# Altium PCB 中板2020-03-20.PCBDOC
Units mm, origin at the board's own origin, x right, y up, seen from the top; angles counter-clockwise.
Board outline 266 x 58 mm, 2 copper layers (Top Layer, Bottom Layer); 7 components, 81 nets, 242 pads, 0 vias.
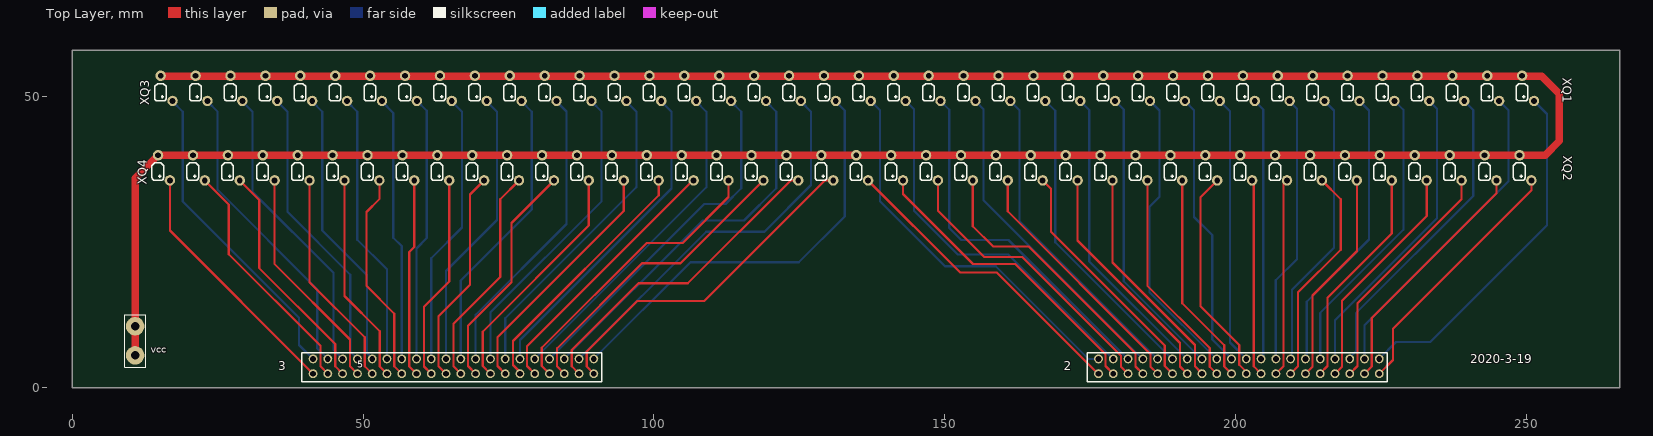
[diagram p0: Top Layer view]
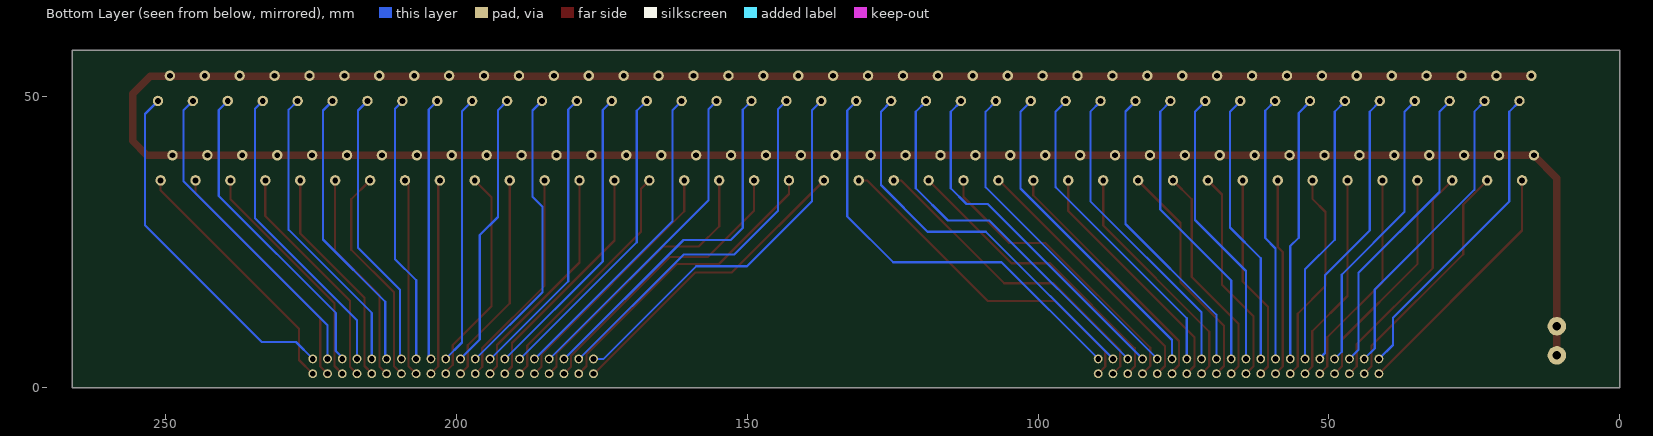
[diagram p1: Bottom Layer view, seen from below]

## Layer stack, top to bottom
Top Solder: solder mask 0.0102, Solder Resist, Dk 3.5
Top Layer: signal copper 0.0356
Dielectric1: dielectric 0.32, FR-4, Dk 4.8
Bottom Layer: signal copper 0.0356
Bottom Solder: solder mask 0.0102, Solder Resist, Dk 3.5

## Board outline
0,0 266,0 266,58 0,58

## Design rules (kind name [scope] priority, off if disabled: settings)
Clearance [All] p1: gap=0.254 ignorepadtopadclearanceinfootprint=FALSE
DiffPairsRouting [All] p1: maxlimit=0.254 minlimit=0.254 mostfreqgap=0.254 toplayer_minwidth=0.381 toplayer_maxwidth=4 toplayer_prefwidth=0.381 bottomlayer_minwidth=0.381 bottomlayer_maxwidth=4 bottomlayer_prefwidth=0.381 maxuncoupledlength=12.7
FabricationTestPointUsage TestPointUsage [All] p1: valid=0 allowmultiple=FALSE
FabricationTestpoint Testpoint [All] p1: side=3 testpointundercomponent=TRUE minsize=1.016 maxsize=2.54 preferedsize=1.524 minholesize=0 maxholesize=1.016 preferedholesize=0.813 testpointgrid=0.025 allowsidetop=TRUE allowsidebottom=TRUE usegrid=TRUE gridtolerance=0
PolygonConnect [All] p1: connectstyle=Relief reliefconductorwidth=0.254 reliefentries=4 polygonreliefangle="90 Angle" airgapwidth=0.254
RoutingVias [All] p1: holewidth=0.8 width=1.6 viastyle="Through Hole" minholewidth=0.711 minwidth=1.27 maxholewidth=0.711 maxwidth=1.27
SilkToSolderMaskClearance SilkscreenOverComponentPads [IsPad] p1: minsilkscreentomaskgap=0.254 clearancetoexposedcopper=TRUE
SolderMaskExpansion [All] p1: expansion=0.102
Width [All] p1: maxlimit=1.27 minlimit=0.254 preferedwidth=0.381 minimp=50.000000 maximp=50.000000 favimp=50.000000
26 further rules are at their usual default settings.

## Classes and differential pairs
component class 盲文原理图1: 2 XQ1 XQ2

## Components (designator, comment, footprint, x,y, rotation, side; value= is the part's Value field where it differs from the comment)
2 "Header 21X2" XINPIAN 174.5,1 r180 top (schematic designator 1)
3 "Header 21X2" XINPIAN 39.5,1 r180 top (schematic designator 1)
XQ1 "Header 20X2" XIANQUAN1 251.25,49.27 r180 top
XQ2 "Header 20X2" XIANQUAN1 250.799,35.61 r180 top
XQ3 "Header 20X2" XIANQUAN1 131.25,49.27 r180 top (schematic designator XQ1)
XQ4 "Header 20X2" XIANQUAN1 130.799,35.61 r180 top (schematic designator XQ2)
? "" N1A 9,3.5 r0 top

## Footprints (in the part's own frame and the unit in brackets; to place one, negate y for a bottom-side part, rotate by r counter-clockwise, add the part's x,y. Pads: shape width x height; smd on the part's side, far side on the other; paste and mask are expansions set on the pad)
N1A [mm]
  round 3.175 hole 1.5: 1(1.825,2.05) 2(1.825,7.05)
  silkscreen extent 0,0 3.65,9
XIANQUAN1 [mm]
  round 1.8 hole 1: 1(2.04,-4.34) 2(0,0) 3(8.04,-4.34) 4(6,0) 5(14.04,-4.34) 6(12,0) 7(20.04,-4.34) 8(18,0) 9(26.04,-4.34) 10(24,0) 11(32.04,-4.34) 12(30,0) 13(38.04,-4.34) 14(36,0) 15(44.04,-4.34) 16(42,0) 17(50.04,-4.34) 18(48,0) 19(56.04,-4.34) 20(54,0) 21(62.04,-4.34) 22(60,0) 23(68.04,-4.34) 24(66,0) 25(74.04,-4.34) 26(72,0) 27(80.04,-4.34) 28(78,0) 29(86.04,-4.34) 30(84,0) 31(92.04,-4.34) 32(90,0) 33(98.04,-4.34) 34(96,0) 35(104.04,-4.34) 36(102,0) 37(110.04,-4.34) 38(108,0) 39(116.04,-4.34) 40(114,0)
  silkscreen extent 1.08,-3 117.08,0
XINPIAN [mm]
  round 1.524 hole 1: 1(-1.9,-3.94) 2(-4.44,-3.94) 3(-6.98,-3.94) 4(-9.52,-3.94) 5(-12.06,-3.94) 6(-14.6,-3.94) 7(-17.14,-3.94) 8(-19.68,-3.94) 9(-22.22,-3.94) 10(-24.76,-3.94) 11(-27.3,-3.94) 12(-29.84,-3.94) 13(-32.38,-3.94) 14(-34.92,-3.94) 15(-37.46,-3.94) 16(-40,-3.94) 17(-42.54,-3.94) 18(-45.08,-3.94) 19(-47.62,-3.94) 20(-50.16,-3.94) 21(-50.16,-1.4) 22(-47.62,-1.4) 23(-45.08,-1.4) 24(-42.54,-1.4) 25(-40,-1.4) 26(-37.46,-1.4) 27(-34.92,-1.4) 28(-32.38,-1.4) 29(-29.84,-1.4) 30(-27.3,-1.4) 31(-24.76,-1.4) 32(-22.22,-1.4) 33(-19.68,-1.4) 34(-17.14,-1.4) 35(-14.6,-1.4) 36(-12.06,-1.4) 37(-9.52,-1.4) 38(-6.98,-1.4) 39(-4.44,-1.4) 40(-1.9,-1.4)
  silkscreen extent -51.5,-5 0,0

## Part data
2 3: library part "Header 22X2", "Header, 22-Pin, Dual row"
XQ1 XQ2 XQ3 XQ4: "Header, 20-Pin, Dual row"

## Nets (pads, with @x,y where several pads share a name; then routed paths per layer and width w, separated by ;. In a path a pad name is that pad's centre, name@x,y a point inside that pad or via, vN(x,y) a via of type N, cw(c..) or ccw(c..) an arc to the next point about the centre after c; other vN are vias at no path point)
GND: ?.1 ?.2 XQ1.1 XQ1.3 XQ1.5 XQ1.7 XQ1.9 XQ1.11 XQ1.13 XQ1.15 XQ1.17 XQ1.19 XQ1.21 XQ1.23 XQ1.25 XQ1.27 XQ1.29 XQ1.31 XQ1.33 XQ1.35 XQ1.37 XQ1.39 XQ2.1 XQ2.3 XQ2.5 XQ2.7 XQ2.9 XQ2.11 XQ2.13 XQ2.15 XQ2.17 XQ2.19 XQ2.21 XQ2.23 XQ2.25 XQ2.27 XQ2.29 XQ2.31 XQ2.33 XQ2.35 XQ2.37 XQ2.39 XQ3.1 XQ3.3 XQ3.5 XQ3.7 XQ3.9 XQ3.11 XQ3.13 XQ3.15 XQ3.17 XQ3.19 XQ3.21 XQ3.23 XQ3.25 XQ3.27 XQ3.29 XQ3.31 XQ3.33 XQ3.35 XQ3.37 XQ3.39 XQ4.1 XQ4.3 XQ4.5 XQ4.7 XQ4.9 XQ4.11 XQ4.13 XQ4.15 XQ4.17 XQ4.19 XQ4.21 XQ4.23 XQ4.25 XQ4.27 XQ4.29 XQ4.31 XQ4.33 XQ4.35 XQ4.37 XQ4.39 | length 527.6
  Top Layer w1.27: ?.1 ?.2 10.825,36.016 XQ4.39 XQ4.37 XQ4.35 XQ4.33 XQ4.31 XQ4.29 XQ4.27 XQ4.25 XQ4.23 XQ4.21 XQ4.19 XQ4.17 XQ4.15 XQ4.13 XQ4.11 XQ4.9 XQ4.7 XQ4.5 XQ4.3 XQ4.1 XQ2.39 XQ2.37 XQ2.35 XQ2.33 XQ2.31 XQ2.29 XQ2.27 XQ2.25 XQ2.23 XQ2.21 XQ2.19 XQ2.17 XQ2.15 XQ2.13 XQ2.11 XQ2.9 XQ2.7 XQ2.5 XQ2.3 XQ2.1 253.15,39.95 255.588,42.388 255.588,50.487 252.575,53.5 XQ3.39@15.21,53.5
XQ1_1: 3.20 XQ3.2 | length 73.6
  Bottom Layer w0.381: 3.20 106.27,21.55 124.9,21.55 132.775,29.425 132.775,47.635 XQ3.2@131.25,49.16
XQ1_2: 3.19 XQ3.4 | length 67.3
  Bottom Layer w0.381: 3.19 108.98,26.8 118.98,26.8 127,34.82 127,47.41 XQ3.4@125.25,49.16
XQ1_3: 3.18 XQ3.6 | length 64.2
  Bottom Layer w0.381: 3.18 108.365,28.725 115.475,28.725 121,34.25 121,47.41 XQ3.6@119.25,49.16
XQ1_4: 3.17 XQ3.8 | length 60.7
  Bottom Layer w0.381: 3.17 108.65,31.55 112.275,31.55 115,34.275 115,47.41 XQ3.8@113.25,49.16
XQ1_5: 3.16 XQ3.10 | length 57.2
  Bottom Layer w0.381: 3.16 109,34.44 109,47.41 XQ3.10@107.25,49.16
XQ1_6: 3.15 XQ3.12 | length 55.7
  Bottom Layer w0.381: 3.15 76.96,8.185 103,34.225 103,47.41 XQ3.12@101.25,49.16
XQ1_7: 3.14 XQ3.14 | length 54.3
  Bottom Layer w0.381: 3.14 74.42,11.92 96.95,34.45 97,34.45 97,47.41 XQ3.14@95.25,49.16
XQ1_8: 3.13 XQ3.16 | length 52.9
  Bottom Layer w0.381: 3.13 71.88,12.93 91,32.05 91,47.41 XQ3.16@89.25,49.16
XQ1_9: 3.12 XQ3.18 | length 51.4
  Bottom Layer w0.381: 3.12 69.34,12.515 84.95,28.125 84.95,47.46 XQ3.18@83.25,49.16
XQ1_10: 3.11 XQ3.20 | length 50
  Bottom Layer w0.381: 3.11 66.8,18.425 78.975,30.6 78.975,47.435 XQ3.20@77.25,49.16
XQ1_11: 3.10 XQ3.22 | length 48.6
  Bottom Layer w0.381: 3.10 64.26,20.06 73,28.8 73,47.41 XQ3.22@71.25,49.16
XQ1_12: 3.9 XQ3.24 | length 47.1
  Bottom Layer w0.381: 3.9 61.72,22.245 67,27.525 67,47.41 XQ3.24@65.25,49.16
XQ1_13: 3.8 XQ3.26 | length 45.8
  Bottom Layer w0.381: 3.8 59.18,23.93 60.95,25.7 60.95,47.57 XQ3.26
XQ1_14: 3.7 XQ3.28 | length 45.6
  Bottom Layer w0.381: XQ3.28@53.25,49.16 55.2,47.21 55.2,25.775 56.64,24.335 3.7
XQ1_15: 3.6 XQ3.30 | length 47.1
  Bottom Layer w0.381: XQ3.30@47.25,49.16 49,47.41 49,25.425 54.1,20.325 3.6
XQ1_16: 3.5 XQ3.32 | length 48.5
  Bottom Layer w0.381: XQ3.32@41.25,49.16 43,47.41 43,27 50.688,19.312 50.688,5.953 51.56,5.081 3.5
XQ1_17: 3.4 XQ3.34 | length 49.9
  Bottom Layer w0.381: XQ3.34@35.25,49.16 37,47.41 37,30.209 47.804,19.404 47.804,6.156 3.4
XQ1_18: 3.3 XQ3.36 | length 51.4
  Bottom Layer w0.381: XQ3.36@29.25,49.16 31,47.41 31,33.62 44.935,19.685 44.935,6.485 3.3
XQ1_19: 3.2 XQ3.38 | length 52.8
  Bottom Layer w0.381: XQ3.38@23.25,49.16 25,47.41 25,34 42.138,16.862 42.138,6.743 3.2
XQ1_20: 3.1 XQ3.40 | length 54.2
  Bottom Layer w0.381: XQ3.40@17.25,49.16 19,47.41 19,32 39,12 39,7.34 3.1
XQ2_1: 3.21 XQ4.2 | length 58.9
  Top Layer w0.381: 3.21 88.425,3.635 88.425,6.225 97.1,14.9 108.625,14.9 129.335,35.61 XQ4.2
XQ2_2: 3.22 XQ4.4 | length 55.6
  Top Layer w0.381: 3.22 85.85,3.67 85.85,6.475 97.325,17.95 105.825,17.95 123.485,35.61 XQ4.4
XQ2_3: 3.23 XQ4.6 | length 52.3
  Top Layer w0.381: 3.23 83.35,3.63 83.35,6.775 97.95,21.375 104.564,21.375 XQ4.6
XQ2_4: 3.24 XQ4.8 | length 50.7
  Top Layer w0.381: 3.24 80.725,3.715 80.725,6.85 98.75,24.875 104.917,24.875 112.799,32.757 XQ4.8
XQ2_5: 3.25 XQ4.10 | length 45.7
  Top Layer w0.381: 3.25 78.175,3.725 78.175,7.125 106.66,35.61 XQ4.10
XQ2_6: 3.26 XQ4.12 | length 44.1
  Top Layer w0.381: 3.26 76.96,2.677 75.75,3.887 75.75,8 100.799,33.049 XQ4.12
XQ2_7: 3.27 XQ4.14 | length 42.7
  Top Layer w0.381: 3.27 73.1,3.72 73.1,8.675 94.799,30.374 XQ4.14
XQ2_8: 3.28 XQ4.16 | length 41.3
  Top Layer w0.381: 3.28 70.55,3.73 70.55,9.625 88.799,27.874 XQ4.16
XQ2_9: 3.29 XQ4.18 | length 39.9
  Top Layer w0.381: 3.29 68.025,3.715 68.025,10.625 75.5,18.1 75.5,28.311 XQ4.18
XQ2_10: 3.30 XQ4.20 | length 38.8
  Top Layer w0.381: 3.30 65.525,3.675 65.525,10.975 73.575,19.025 73.575,32.386 XQ4.20 XQ4.20@77.1,35.309
XQ2_11: 3.31 XQ4.22 | length 37
  Top Layer w0.381: 3.31 62.975,3.685 62.975,12.275 68.375,17.675 68.375,33.186 XQ4.22
XQ2_12: 3.32 XQ4.24 | length 35.5
  Top Layer w0.381: 3.32 60.475,3.645 60.475,13.9 64.799,18.224 XQ4.24
XQ2_13: 3.33 XQ4.26 | length 34.1
  Top Layer w0.381: XQ4.26 58.799,24.173 57.95,23.324 57.95,3.63 3.33
XQ2_14: 3.34 XQ4.28 | length 36.6
  Top Layer w0.381: XQ4.28 52.799,32.399 50.575,30.175 50.575,17.488 55.35,12.712 55.35,3.69 3.34
XQ2_15: 3.35 XQ4.30 | length 36.2
  Top Layer w0.381: XQ4.30 46.799,15.751 52.85,9.7 52.85,3.65 3.35
XQ2_16: 3.36 XQ4.32 | length 37.7
  Top Layer w0.381: XQ4.32 40.799,18.126 50.275,8.65 50.275,3.685 3.36
XQ2_17: 3.37 XQ4.34 | length 39.1
  Top Layer w0.381: XQ4.34 34.799,21.226 47.75,8.275 47.75,3.67 3.37
XQ2_18: 3.38 XQ4.36 | length 40.5
  Top Layer w0.381: XQ4.36 32.159,32.25 32.159,20.541 45.2,7.5 45.2,3.68 3.38
XQ2_19: 3.39 XQ4.38 | length 42
  Top Layer w0.381: XQ4.38 26.93,31.48 26.93,22.92 42.7,7.15 42.7,3.64 3.39
XQ2_20: 3.40 XQ4.40 | length 43.4
  Top Layer w0.381: XQ4.40 16.799,27.001 3.40
XQ3_1: 2.21 XQ2.2 | length 44
  Top Layer w0.381: 2.21 227.025,4.765 227.025,10.125 250.799,33.899 XQ2.2
XQ3_2: 2.22 XQ2.4 | length 42.7
  Top Layer w0.381: 2.22 223.35,3.63 223.35,11.963 244.799,33.413 XQ2.4 XQ2.4@244.7,35.511
XQ3_3: 2.23 XQ2.6 | length 41.2
  Top Layer w0.381: 2.23 220.9,3.72 220.9,14.5 238.799,32.399 XQ2.6
XQ3_4: 2.24 XQ2.8 | length 39.7
  Top Layer w0.381: 2.24 218.247,3.607 218.247,14.946 232.799,29.499 XQ2.8
XQ3_5: 2.25 XQ2.10 | length 39
  Top Layer w0.381: 2.25 214.5,2.486 215.75,3.736 215.75,15.425 226.799,26.474 XQ2.10 XQ2.10@226.325,35.136
XQ3_6: 2.26 XQ2.12 | length 36.9
  Top Layer w0.381: 2.26 213.167,3.607 213.167,15.816 220.825,23.475 220.825,35.584 XQ2.12
XQ3_7: 2.27 XQ2.14 | length 38.1
  Top Layer w0.381: 2.27 210.7,3.68 210.7,16.375 218.025,23.7 218.025,32.384 XQ2.14
XQ3_8: 2.28 XQ2.16 | length 34
  Top Layer w0.381: 2.28 208.214,3.734 208.214,35.024 XQ2.16
XQ3_9: 2.29 XQ2.18 | length 33.8
  Top Layer w0.381: XQ2.18 203.075,35.334 203.075,3.665 2.29
XQ3_10: 2.30 XQ2.20 | length 37.6
  Top Layer w0.381: XQ2.20 193.95,32.761 193.95,13.95 200.575,7.325 200.575,3.934 201.8,2.709 2.30
XQ3_11: 2.31 XQ2.22 | length 36.7
  Top Layer w0.381: XQ2.22 190.799,14.501 198.025,7.275 198.025,3.635 2.31
XQ3_12: 2.32 XQ2.24 | length 38.1
  Top Layer w0.381: XQ2.24 184.799,17.526 195.514,6.812 195.514,3.607 2.32
XQ3_13: 2.33 XQ2.26 | length 39.6
  Top Layer w0.381: XQ2.26 178.799,21.501 192.974,7.327 192.974,3.652 194.18,2.445 2.33
XQ3_14: 2.34 XQ2.28 | length 41
  Top Layer w0.381: XQ2.28 172.799,25.276 190.4,7.675 190.4,3.64 2.34
XQ3_15: 2.35 XQ2.30 | length 42.4
  Top Layer w0.381: XQ2.30 168.25,34.159 168.25,26.775 187.8,7.225 187.8,3.7 2.35
XQ3_16: 2.36 XQ2.32 | length 43.9
  Top Layer w0.381: XQ2.32 160.799,30.301 185.354,5.747 185.354,3.607 2.36
XQ3_17: 2.37 XQ2.34 | length 48.9
  Top Layer w0.381: XQ2.34 154.799,27.751 158.288,24.262 164.413,24.262 182.775,5.9 182.775,3.645 2.37
XQ3_18: 2.38 XQ2.36 | length 50.6
  Top Layer w0.381: XQ2.36 148.799,30.401 156.75,22.45 163.3,22.45 180.274,5.477 180.274,3.607 2.38
XQ3_19: 2.39 XQ2.38 | length 52.4
  Top Layer w0.381: XQ2.38 142.799,33.276 154.825,21.25 162.075,21.25 177.607,5.719 177.607,3.734 2.39
XQ3_20: 2.40 XQ2.40 | length 53.4
  Top Layer w0.381: XQ2.40 152.638,19.771 158.931,19.771 176.302,2.4 2.40
XQ4_1: 2.20 XQ1.2 | length 60.6
  Bottom Layer w0.381: 2.20 227.545,7.825 233.4,7.825 253.5,27.925 253.5,47.02 XQ1.2
XQ4_2: 2.19 XQ1.4 | length 55.2
  Bottom Layer w0.381: 2.19 222.12,10.733 246.85,35.463 246.85,47.67 XQ1.4
XQ4_3: 2.18 XQ1.6 | length 53.9
  Bottom Layer w0.381: 2.18@219.482,4.94 2.18 219.58,5.17 220.7,6.29 220.7,12.85 240.8,32.95 240.8,47.72 XQ1.6
XQ4_4: 2.17 XQ1.8 | length 52.1
  Bottom Layer w0.381: 2.17 217.04,11.59 234.575,29.125 234.575,47.945 XQ1.8
XQ4_5: 2.16 XQ1.10 | length 50.9
  Bottom Layer w0.381: 2.16 214.5,12.85 228.8,27.15 228.8,47.75 227.28,49.27 XQ1.10
XQ4_6: 2.15 XQ1.12 | length 49.5
  Bottom Layer w0.381: 2.15 212.175,5.155 212.175,14.75 222.9,25.475 222.9,47.62 XQ1.12
XQ4_7: 2.14 XQ1.14 | length 48.1
  Bottom Layer w0.381: 2.14 209.65,5.17 209.65,16.8 216.875,24.025 216.875,47.645 XQ1.14
XQ4_8: 2.13 XQ1.16 | length 46.3
  Bottom Layer w0.381: 2.13 206.88,18.455 210.5,22.075 210.5,47.95 209.25,49.2 XQ1.16
XQ4_9: 2.12 XQ1.18 | length 45.1
  Bottom Layer w0.381: XQ1.18 204.7,47.82 204.7,5.3 2.12
XQ4_10: 2.11 XQ1.20 | length 46.2
  Bottom Layer w0.381: XQ1.20 199,47.52 199,7.74 2.11
XQ4_11: 2.10 XQ1.22 | length 47.6
  Bottom Layer w0.381: XQ1.22 192.825,47.695 192.825,29.325 195.935,26.215 195.935,8.265 2.10
XQ4_12: 2.9 XQ1.24 | length 50.5
  Bottom Layer w0.381: XQ1.24 186.875,47.645 186.875,32.8 185.175,31.1 185.175,16.387 196.622,4.94 2.9
XQ4_13: 2.8 XQ1.26 | length 50.6
  Bottom Layer w0.381: XQ1.26 180.725,47.795 180.725,18.297 194.082,4.94 2.8
XQ4_14: 2.7 XQ1.28 | length 52
  Bottom Layer w0.381: XQ1.28 174.8,47.72 174.8,21.682 191.542,4.94 2.7
XQ4_15: 2.6 XQ1.30 | length 53.4
  Bottom Layer w0.381: XQ1.30 168.95,47.57 168.95,24.992 189.002,4.94 2.6
XQ4_16: 2.5 XQ1.32 | length 54.9
  Bottom Layer w0.381: XQ1.32 162.825,47.695 162.825,28.577 186.462,4.94 2.5
XQ4_17: 2.4 XQ1.34 | length 56.3
  Bottom Layer w0.381: XQ1.34 156.65,47.87 156.65,32.212 183.922,4.94 2.4
XQ4_18: 2.3 XQ1.36 | length 62.5
  Bottom Layer w0.381: XQ1.36 150.75,47.77 150.75,27.45 152.82,25.38 160.942,25.38 181.382,4.94 2.3
XQ4_19: 2.2 XQ1.38 | length 64.3
  Bottom Layer w0.381: XQ1.38 144.675,47.845 144.675,30.4 152.2,22.875 160.907,22.875 178.842,4.94 2.2
XQ4_20: 2.1 XQ1.40 | length 66.7
  Bottom Layer w0.381: XQ1.40 138.85,47.67 138.85,32.025 150.027,20.848 158.752,20.848 174.66,4.94 2.1

## Silkscreen, mask and mechanical layers (free items; w line width, h text height)
Top Overlay:
  text "vcc" at 13.525,5.525 h2.02
  text "2020-3-19" at 240.325,4.175 h1.52
  text "5" at 49,3 h2.02
Mechanical 1:
  drawing of 258 lines, arcs and shapes, not listed